# EAGLE board lr3_2 (EAGLE 9.7.0)

Size 300.76 x 86.97 mm. Coordinates in mm from the lower left corner, seen from the top.
Outline: 0,0 300.76,0 300.76,86.97 0,86.97 0,0
Copper layers (1*16): Top 0.035mm / dielectric 1.5mm / Bottom 0.035mm
Design rules "default": minimum track width 6mil, minimum drill 0.35mm, track to track 6mil, track to pad 6mil, pad to pad 6mil, via to via 6mil, smd to smd 6mil, copper to edge 40mil, drill to drill 6mil, minimum pad ring 10mil, minimum via ring 8mil, stop-mask expansion 4mil, vias tented up to drill 0mil, thermal gap 10mil

## Footprints (pad centres in the part's own frame; a part is rotated, then mirrored left to right if it is on the bottom)
MOTOR = drill 1.118 pad 3.15 octagon: + 2.54,0; - -2.54,0
RESAD1016W63L850D250B = drill 0.83 pad 1.43: 1 -5.08,0; 2 5.08,0
HA-06-SM065 = drill 1 pad 1.676: 1 -2.54,-2.54; 2 0,2.54; 3 2.54,-2.54
SWITCH-MOMENTARY-PTH-6.5MM = drill 1.016 pad 1.88: 1 -3.251,2.261; 2 3.251,2.261; 3 -3.251,-2.261; 4 3.251,-2.261
ARDUINO-UNO-R3-SHIELD = drill 1.016 pad 1.88: 3.3V 24.13,-2.54; 5V 24.13,0; A0 24.13,12.7; A1 24.13,15.24; A2 24.13,17.78; A3 24.13,20.32; A4 24.13,22.86; A5 24.13,25.4; AREF -24.13,-13.97; D2 -24.13,20.32; D3 -24.13,17.78; D4 -24.13,15.24; D5 -24.13,12.7; D6 -24.13,10.16; D7 -24.13,7.62; D8 -24.13,3.81; D9 -24.13,1.27; D10 -24.13,-1.27; D11 -24.13,-3.81; D12 -24.13,-6.35; D13 -24.13,-8.89; GND@0 24.13,2.54; GND@1 24.13,5.08; GND@2 -24.13,-11.43; IOREF 24.13,-7.62; NC 24.13,-10.16; RES 24.13,-5.08; RX -24.13,25.4; SCL -24.13,-19.05; SDA -24.13,-16.51; TX -24.13,22.86; VIN 24.13,7.62
DIP762W53P254L1969H508Q16B = drill 0.743 pad 1.343: 1 -3.81,8.89; 2 -3.81,6.35; 3 -3.81,3.81; 4 -3.81,1.27; 5 -3.81,-1.27; 6 -3.81,-3.81; 7 -3.81,-6.35; 8 -3.81,-8.89; 9 3.81,-8.89; 10 3.81,-6.35; 11 3.81,-3.81; 12 3.81,-1.27; 13 3.81,1.27; 14 3.81,3.81; 15 3.81,6.35; 16 3.81,8.89
LCD-I2C = drill 1.016 long: 1 -19.05,-5.08; 2 -19.05,-7.62; 3 -19.05,-10.16; 4 -19.05,-12.7

## Placement (x,y rotation side)
M1  MOTOR_HDR  [MOTOR]  94.19,78.72 0 top
R1  1k  [RESAD1016W63L850D250B]  169.99,20.28 0 top
RPOT1  250k  [HA-06-SM065]  119.19,25.36 0 top
S1  SWITCH_MOMENTARY  [SWITCH-MOMENTARY-PTH-6.5MM]  162.37,29.17 90 top
U1  ARDUINO-UNO-R3-SHIELD  [ARDUINO-UNO-R3-SHIELD]  47.88,29.84 270 top
U2  L293E  [DIP762W53P254L1969H508Q16B]  138.24,29.17 90 top
U3  LCD-16X2-I2CSUNFOUNDER-IIC  [LCD-I2C]  245.14,58.36 0 top

## Library data of the parts
M1 R1 RPOT1 S1 U1-U3 = Tinkercad

## Nets
M1_+: M1.+ U2.11
M1_-: M1.- U2.14
U1_5V: RPOT1.3 S1.1 S1.2 U1.5V U2.1 U2.8 U2.9 U2.16 U3.2
U1_A0: RPOT1.2 U1.A0
U1_D6: U1.D6 U2.10
U1_D7: U1.D7 U2.15
U1_D13: R1.1 S1.3 S1.4 U1.D13
U1_GND: R1.2 RPOT1.1 U1.GND@0 U1.GND@1 U1.GND@2 U2.4 U2.5 U2.12 U2.13 U3.1
U1_SCL: U1.SCL U3.4
U1_SDA: U1.SDA U3.3

## Tracks (layer width: path | path; a pad name or v marks a point on that pad's centre or on a via)
M1_+  (1 unrouted)
M1_-  (1 unrouted)
U1_5V  (8 unrouted)
U1_A0  (1 unrouted)
U1_D6  (1 unrouted)
U1_D7  (1 unrouted)
U1_D13  (3 unrouted)
U1_GND  (9 unrouted)
U1_SCL  (1 unrouted)
U1_SDA  (1 unrouted)